# EAGLE board uzenet-module-v2.0 (EAGLE 9.6.2)
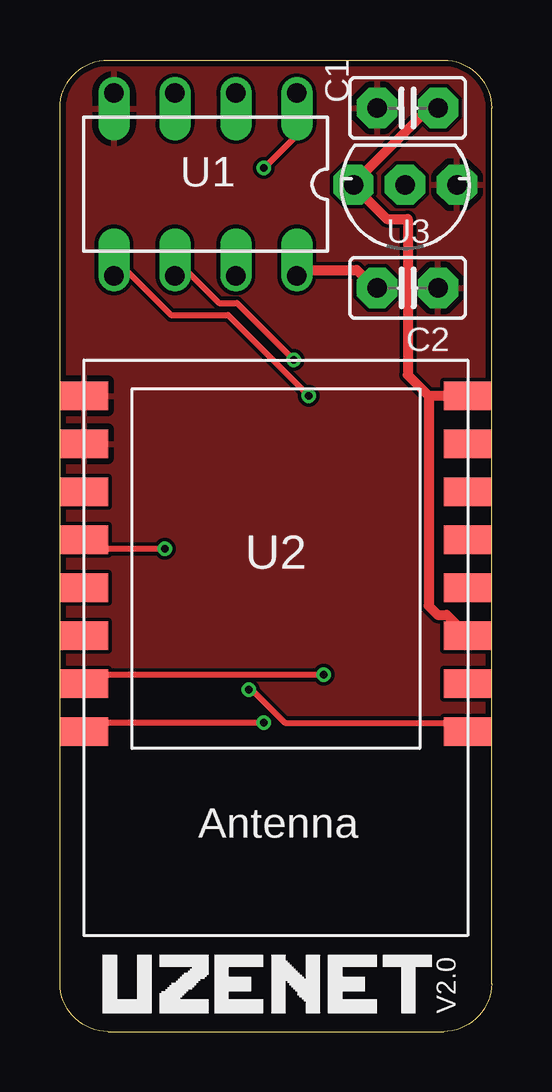
[diagram p0: board, top side]
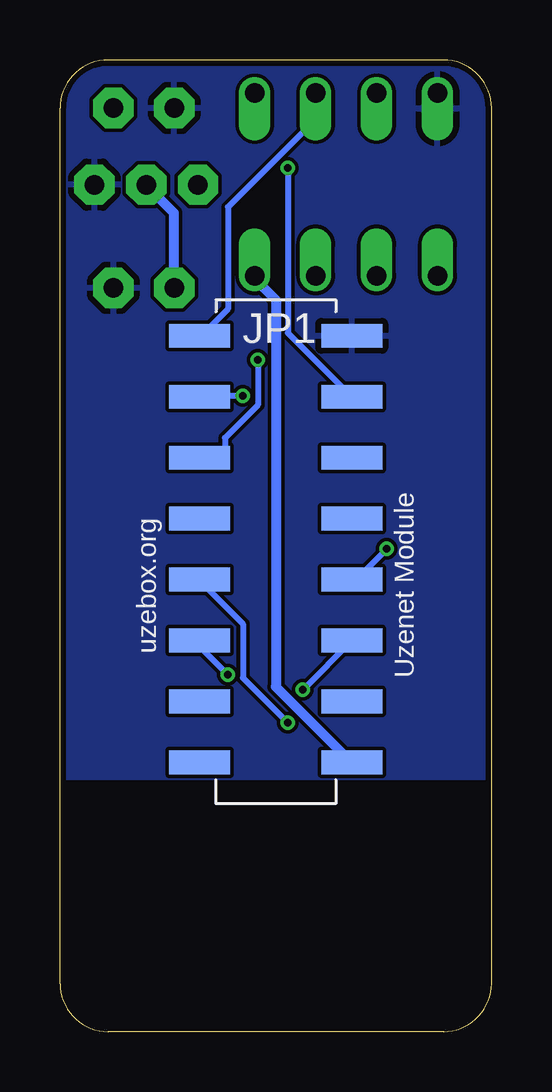
[diagram p1: board, bottom side, seen from below]

Size 18 x 40.5 mm. Coordinates in mm from the lower left corner, seen from the top.
Outline: 2,0 16,0 arc90 18,2 18,38.5 arc90 16,40.5 2,40.5 arc90 0,38.5 0,2 arc90 2,0
Copper layers (1*16): Top 0.035mm / dielectric 1.5mm / Bottom 0.035mm
Design rules "ITEADstudio_DRC": minimum track width 6mil, minimum drill 12mil, track to track 6mil, track to pad 6mil, pad to pad 6mil, via to via 6mil, smd to smd 0mil, copper to edge 10mil, drill to drill 10mil, minimum pad ring 10mil, minimum via ring 6mil, stop-mask expansion 2mil, vias tented up to drill 100mil, thermal gap 10mil
Net classes: 0 default: width 0.254 mm; 1 Ground: width 0.406 mm; 2 Power: width 0.406 mm

## Footprints (pad centres in the part's own frame; a part is rotated, then mirrored left to right if it is on the bottom)
C025-025X050 = drill 0.813 pad 1.676 octagon: 1 -1.27,0; 2 1.27,0
HEADER_2X8_SMT_BOTTOM_LAYER = smd 2.54 x 0.991 bottom: P$1 -3.175,0; P$2 3.175,0; P$3 -3.175,-2.54; P$4 3.175,-2.54; P$5 -3.175,-5.08; P$6 3.175,-5.08; P$7 -3.175,-7.62; P$8 3.175,-7.62; P$9 -3.175,-10.16; P$10 3.175,-10.16; P$11 -3.175,-12.7; P$12 3.175,-12.7; P$13 -3.175,-15.24; P$14 3.175,-15.24; P$15 -3.175,-17.78; P$16 3.175,-17.78
DIL08 = drill 0.813 offset: 1 -5.08,-5.08; 2 -2.54,-5.08; 3 0,-5.08; 4 2.54,-5.08; 5 2.54,2.54; 6 0,2.54; 7 -2.54,2.54; 8 -5.08,2.54
ESP-12 = smd 2 x 1.2: 1 -8,4.5; 2 -8,2.5; 3 -8,0.5; 4 -8,-1.5; 5 -8,-3.5; 6 -8,-5.5; 7 -8,-7.5; 8 -8,-9.5; 9 8,-9.5; 10 8,-7.5; 11 8,-5.5; 12 8,-3.5; 13 8,-1.5; 14 8,0.5; 15 8,2.5; 16 8,4.5
TO92-INLINE = drill 0.813 pad 1.676 octagon: 1 -2.159,0; 2 0,0; 3 2.159,0

## Placement (x,y rotation side)
C1  1uF  [C025-025X050]  14.5,38.5 180 top
C2  1uF  [C025-025X050]  14.5,31 0 top
JP1  NPPC082KFMS-RC  [HEADER_2X8_SMT_BOTTOM_LAYER]  9,29 0 top
U1  23LC1024  [DIL08]  4.8,34.05 180 top
U2  [ESP-12]  9,17 180 top
U3  MCP1700  [TO92-INLINE]  14.4,35.3 180 top
U$1  [UZENETLOGO]  1.66,0.54 0 top

## Library data of the parts
C1 C2 U3 = adafruit
JP1 U1 U2 U$1 = uzebox

## Nets
+3V3 [Power]: C1.1 U2.3 U2.8 U3.3
ESP_PROG: JP1.P$9 U2.12
ESP_RST: JP1.P$11 U2.1
GND [Ground]: C1.2 C2.2 JP1.P$1 U1.4 U2.9 U2.10 U3.1
MISO: JP1.P$2 U1.2
MOSI: JP1.P$4 U1.5
SCK: JP1.P$6 U1.6
SPIRAM_EN: JP1.P$3 U1.1
UART_RX: JP1.P$10 U2.16
UART_TX: JP1.P$12 U2.15
VCC [Power]: C2.1 JP1.P$15 U1.8 U3.2

## Tracks (layer width: path | path; a pad name or v marks a point on that pad's centre or on a via)
+3V3
  Top 0.406: U2.3 16.12,17.38 15.75,17.38 15.38,17.75 15.38,26.5 | U2.8 15.38,26.5 | C1.1 15.38,38.5 12.25,35.38 U3.3 12.25,35.12 12.38,35.12 13.62,33.88 14.5,33.88 14.5,27.38 15.38,26.5
ESP_PROG  (via drill 0.3)
  Top 0.254: U2.12 1.38,20.12 v4.38,20.12
  Bottom 0.254: v4.38,20.12 5.75,18.75 JP1.P$9
ESP_RST  (via drill 0.3)
  Top 0.254: U2.1 16.62,12.88 9.38,12.88 8,14.25 v7.88,14.25
  Bottom 0.254: JP1.P$11 v7.88,14.25
GND
  pour Top: 18,10.5 18,38.5 arc90 16,40.5 2,40.5 arc90 0,38.5 0,10.5
  pour Bottom: 18,10.5 18,38.5 arc90 16,40.5 2,40.5 arc90 0,38.5 0,10.5
MISO
  Bottom 0.254: JP1.P$2 12.12,29 11,30.12 11,34.38 7.38,38 7.38,39.12 U1.2
MOSI  (via drill 0.3)
  Top 0.254: v10.38,26.5 7,29.88 4.62,29.88 2.88,31.62 2.38,31.62 U1.5
  Bottom 0.254: v10.38,26.5 12.12,26.5 JP1.P$4
SCK  (via drill 0.3)
  Top 0.254: v9.75,28 7.38,30.38 6.62,30.38 5.38,31.62 4.88,31.62 U1.6
  Bottom 0.254: v9.75,28 9.75,26.12 11.12,24.75 11.12,24 12.12,24 JP1.P$6
SPIRAM_EN  (via drill 0.3)
  Top 0.254: v8.5,36 9.88,37.38 U1.1
  Bottom 0.254: v8.5,36 8.5,29.12 5.88,26.5 JP1.P$3
UART_RX  (via drill 0.3)
  Top 0.254: U2.16 1.38,12.88 v8.5,12.88
  Bottom 0.254: v8.5,12.88 10.38,14.75 10.38,17 12.12,18.75 JP1.P$10
UART_TX  (via drill 0.3)
  Top 0.254: U2.15 1.38,14.88 v11,14.88
  Bottom 0.254: v11,14.88 12.12,16 12.12,16.25 JP1.P$12
VCC
  Top 0.406: C2.1 13.12,31 12.38,31.75 10.12,31.75 10,31.62 U1.8
  Bottom 0.406: JP1.P$15 5.88,11.25 9,14.38 9,30.5 9.88,31.38 U1.8 | U3.2 14.38,35.25 13.25,34.12 13.25,31 C2.1

## Text on the board
tPlace: V2.0
bPlace: uzebox.org | Uzenet Module